# EAGLE board seed (EAGLE 6.4)
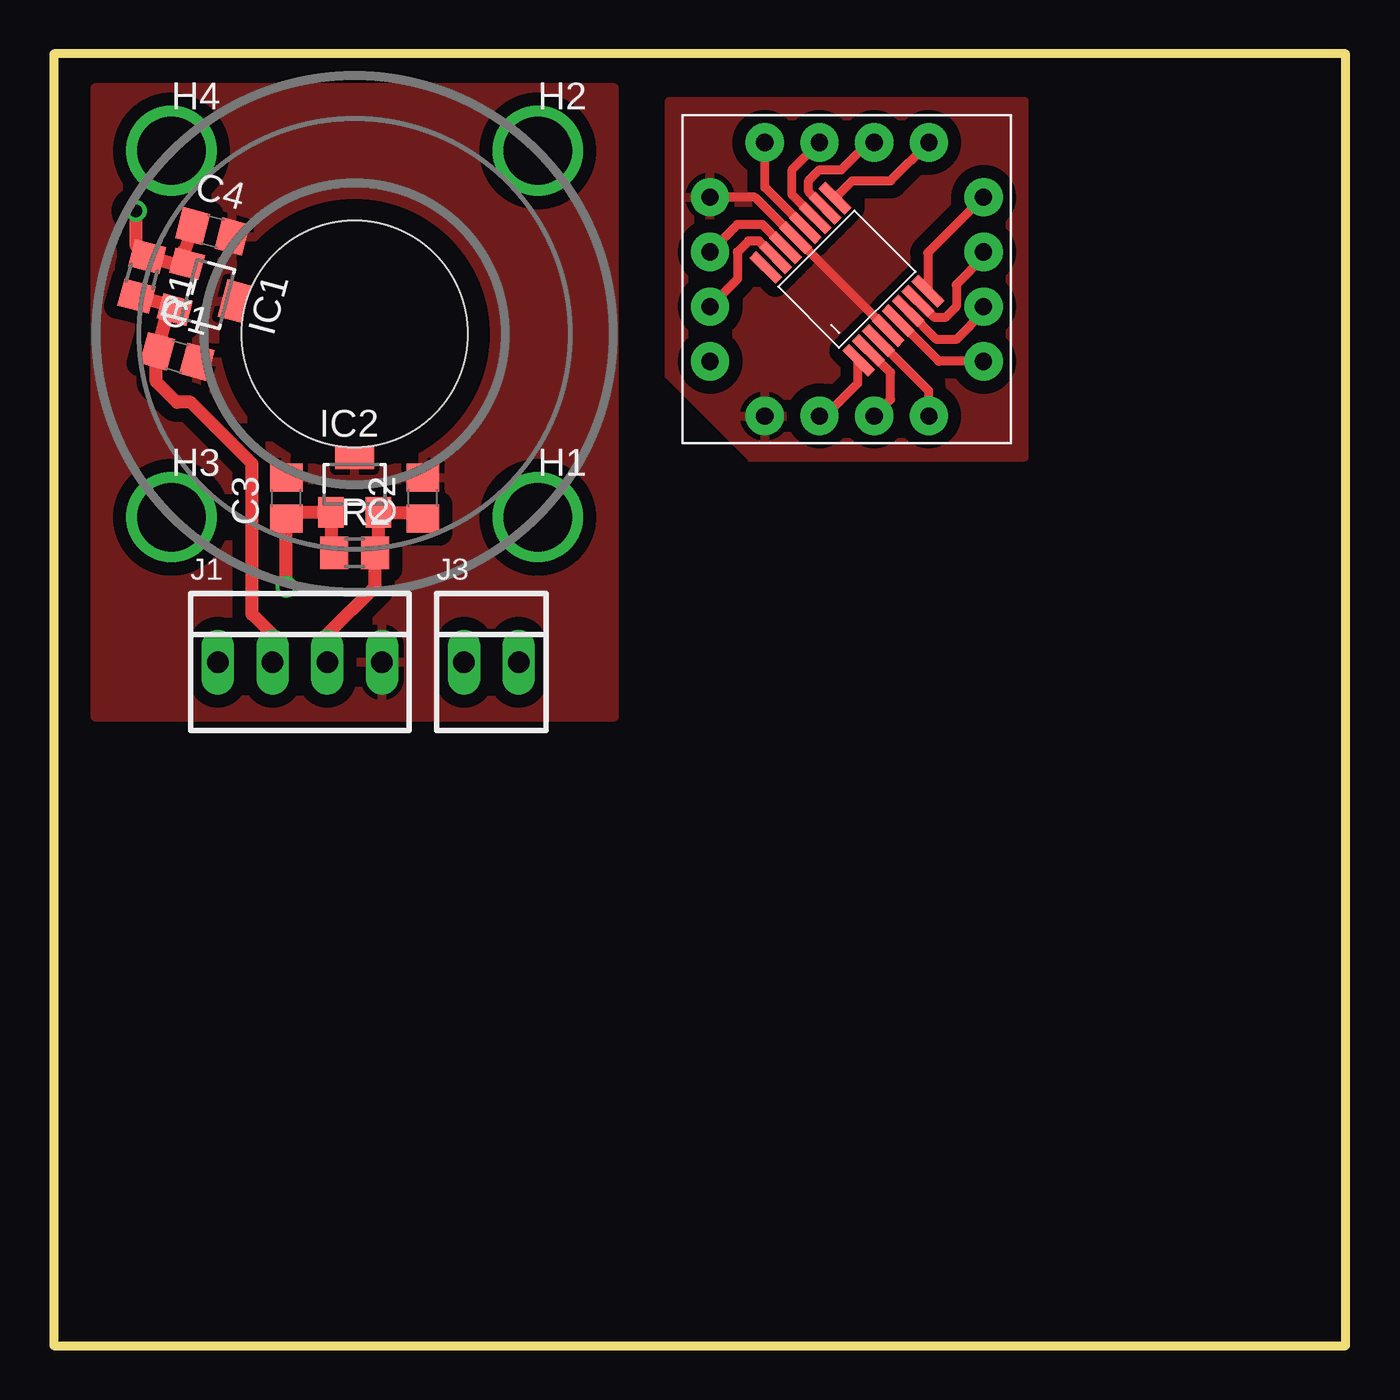
[diagram p0: board, top side]
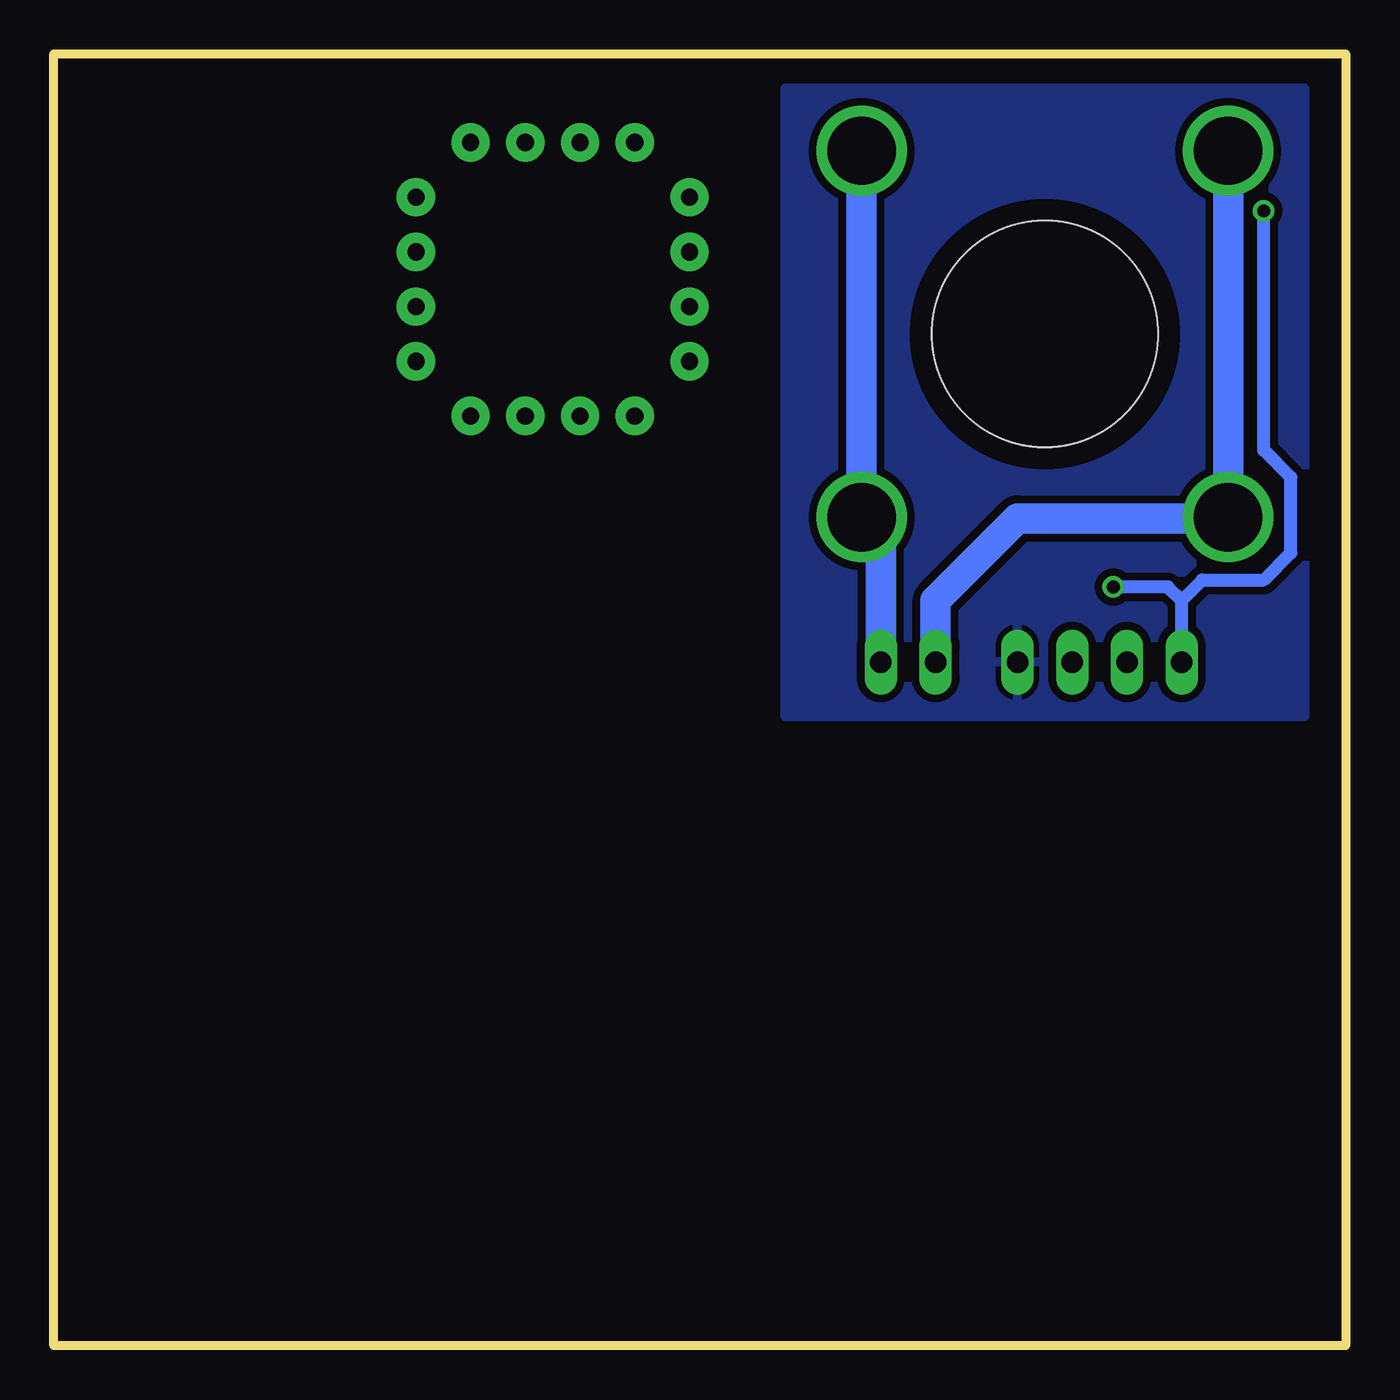
[diagram p1: board, bottom side, seen from below]

Size 60 x 60 mm. Coordinates in mm from the lower left corner, seen from the top.
Outline: 0,0 60,0 60,60 0,60 0,0
Copper layers (1*16): Top 0.035mm / dielectric 1.5mm / Bottom 0.035mm
Design rules "default": minimum track width 10mil, minimum drill 24mil, track to track 8mil, track to pad 8mil, pad to pad 8mil, via to via 8mil, smd to smd 8mil, copper to edge 40mil, drill to drill 8mil, minimum pad ring 10mil, minimum via ring 8mil, stop-mask expansion 4mil, vias tented up to drill 0mil, thermal gap 10mil
Net classes: 0 default: clearance 0.355 mm
Holes 10.5 mm at 13.97,46.99

## Footprints (pad centres in the part's own frame; a part is rotated, then mirrored left to right if it is on the bottom)
C0805 = smd 1.3 x 1.5: 1 -0.95,0; 2 0.95,0
PAD_0.1250 = drill 3.175 pad 3.175: 1 0,0
SOT23-W = smd 1.2 x 1.4: 1 -1.1,-1.3; 2 1.1,-1.3 | smd 1.8 x 1.2: 3 0,1.3
22-23-2041 = drill 1 long: 1 -3.81,0; 2 -1.27,0; 3 1.27,0; 4 3.81,0
22-23-2021 = drill 1 long: 1 -1.27,0; 2 1.27,0
R0805 = smd 1.3 x 1.5: 1 -0.95,0; 2 0.95,0
16TSSOP = smd 0.45 x 1.7: P$1 -2.275,-3.05; P$2 -1.625,-3.05; P$3 -0.975,-3.05; P$4 -0.325,-3.05; P$5 0.325,-3.05; P$6 0.975,-3.05; P$7 1.625,-3.05; P$8 2.275,-3.05; P$9 2.275,3.05; P$10 1.625,3.05; P$11 0.975,3.05; P$12 0.325,3.05; P$13 -0.325,3.05; P$14 -0.975,3.05; P$15 -1.625,3.05; P$16 -2.275,3.05
DIL16 = drill 0.8 pad 1.778: P$1 -1.27,-6.35; P$2 1.27,-6.35; P$3 3.81,-6.35; P$4 -3.81,-6.35; P$5 6.35,-3.81; P$6 6.35,-1.27; P$7 6.35,1.27; P$8 6.35,3.81; P$9 3.81,6.35; P$10 1.27,6.35; P$11 -1.27,6.35; P$12 -3.81,6.35; P$13 -6.35,3.81; P$14 -6.35,1.27; P$15 -6.35,-1.27; P$16 -6.35,-3.81

## Placement (x,y rotation side)
C1  10p  [C0805]  5.72,45.94 345 top
C2  10p  [C0805]  17.14,39.37 90 top
C3  0.1µ  [C0805]  10.79,39.37 90 top
C4  0.1µ  [C0805]  7.37,51.76 345 top
H1  SPECIAL_DRILL_0.1250  [PAD_0.1250]  22.48,38.48 0 top
H2  SPECIAL_DRILL_0.1250  [PAD_0.1250]  22.48,55.5 0 top
H3  SPECIAL_DRILL_0.1250  [PAD_0.1250]  5.46,38.48 0 top
H4  SPECIAL_DRILL_0.1250  [PAD_0.1250]  5.46,55.5 0 top
IC1  A1301LH  [SOT23-W]  7.16,48.84 255 top
IC2  A1301LH  [SOT23-W]  13.97,40.01 0 top
J1  22-23-2041  [22-23-2041]  11.43,31.75 0 top
J3  22-23-2021  [22-23-2021]  20.32,31.75 0 top
R1  10k  [R0805]  4.09,49.66 255 top
R2  10k  [R0805]  13.97,36.83 0 top
U$1  A3950  [16TSSOP]  36.83,49.53 45 top
U$2  A3950-DIL  [DIL16]  36.83,49.53 0 top

## Library data of the parts
C1-C4 R1 R2 = rcl
H1-H4 = special-drill
IC1 IC2 = allegro; MF: ALLEGRO MICROSYSTEMS, INC.; MPN: A1301ELHLT-T; OC_FARNELL: 1198084; OC_NEWARK: 31K6634
J1 = con-molex; MF: MOLEX; MPN: 22-23-2041; OC_FARNELL: 1462920; OC_NEWARK: 38C0355
J3 = con-molex; MF: MOLEX; MPN: 22-23-2021; OC_FARNELL: 1462926; OC_NEWARK: 25C3832
U$1 U$2 = A3950

## Nets
+3.3VCC: C3.1 C4.1 IC1.1 IC2.1 J1.1 R1.1 R2.1
A: C1.1 IC1.2 J1.2 R1.2
B: C2.1 IC2.2 J1.3 R2.2
GND: C1.2 C2.2 C3.2 C4.2 IC1.3 IC2.3 J1.4
GND1: U$1.P$4 U$1.P$13 U$2.P$4 U$2.P$13
N$7: U$1.P$1 U$2.P$1
N$8: U$1.P$2 U$2.P$2
N$9: H3.1 H4.1 J3.1
N$10: U$1.P$3 U$2.P$3
N$11: U$1.P$6 U$2.P$6
N$12: U$1.P$7 U$2.P$7
N$13: U$1.P$5 U$2.P$5
N$14: U$1.P$8 U$2.P$8
N$15: U$1.P$15 U$2.P$15
N$16: U$1.P$14 U$2.P$14
N$17: H1.1 H2.1 J3.2
N$18: U$1.P$12 U$2.P$12
N$19: U$1.P$11 U$2.P$11
N$20: U$1.P$10 U$2.P$10
N$21: U$1.P$9 U$2.P$9

## Tracks (layer width: path | path; a pad name or v marks a point on that pad's centre or on a via)
+3.3VCC  (via drill 0.6)
  Top 0.61: R2.1 12.87,36.98 IC2.1 11.08,38.7 C3.1 v10.79,35.24 | C4.1 5.99,50.59 IC1.1 6,50.13 | 6,50.13 R1.1 3.81,51.11 v3.81,52.7 | 6,50.13 6,50.83
  Bottom 0.61: J1.1 7.62,34.61 | 7.62,34.61 8.26,35.24 v10.79,35.24 | 7.62,34.61 6.67,35.56 3.81,35.56 2.54,36.83 2.54,40.32 3.81,41.59 v3.81,52.7
A
  Top 0.61: R1.2 5.51,48.3 IC1.2 5.27,47.91 C1.1 4.76,46.14 4.76,44.77 5.71,43.81 6.35,43.81 9.21,40.96 9.21,33.97 10.16,33.02 J1.2
B
  Top 0.61: C2.1 16.86,38.7 IC2.2 15.07,36.98 R2.2 14.92,35.24 12.7,33.02 J1.3
GND
  pour Top (isolate 0.61): 1.91,58.42 1.91,29.21 26.04,29.21 26.04,58.42
  pour Bottom: 1.91,58.42 1.91,29.21 26.04,29.21 26.04,58.42
GND1
  Top 0.406: U$2.P$13 32.56,53.34 U$1.P$13 U$1.P$4
  pour Top (isolate 0.61): 28.57,57.78 28.57,41.27 45.09,41.27 45.09,57.78
N$7
  Top 0.406: U$2.P$1 35.81,43.18 37.34,44.7 37.34,45.73 U$1.P$1
N$8
  Top 0.406: U$2.P$2 38.86,43.94 38.86,45.2 U$1.P$2
N$9
  Bottom 1.422: H3.1 | J3.1 19.05,34.61 15.24,38.42 5.52,38.42 H3.1 | H4.1 H3.1
N$10
  Top 0.406: U$2.P$3 40.64,44.34 U$1.P$3
N$11
  Top 0.406: U$2.P$6 43.18,48.01 41.91,46.74 41,46.74 U$1.P$6
N$12
  Top 0.406: U$2.P$7 43.18,50.55 41.91,49.28 41.91,48.26 41.4,47.75 40.91,47.75 U$1.P$7
N$13
  Top 0.406: U$2.P$5 41.1,45.72 U$1.P$5
N$14
  Top 0.406: U$2.P$8 40.59,50.76 U$1.P$8
N$15
  Top 0.406: U$1.P$15 32.75,51.31 32.26,51.31 31.75,50.8 31.75,49.53 U$2.P$15
N$16
  Top 0.406: U$1.P$14 32.91,52.07 31.75,52.07 U$2.P$14
N$17
  Bottom 1.422: H2.1 H1.1 21.59,37.59 J3.2
N$18
  Top 0.406: U$1.P$12 33.02,53.8 U$2.P$12
N$19
  Top 0.406: U$1.P$11 34.29,53.45 34.29,54.61 U$2.P$11
N$20
  Top 0.406: U$1.P$10 35.05,53.61 35.05,54.1 35.56,54.61 36.58,54.61 37.85,55.88 U$2.P$10
N$21
  Top 0.406: U$1.P$9 37.09,54.1 38.86,54.1 U$2.P$9

## Text on the board
_tNames: C4 | IC1 | R1 | C1 | IC2 | C4 | C3 | R2 | C2 | IC1 | R1 | C1 | JP1 | IC2 | C3 | R2 | C2 | JP1